# Altium PCB CurrentShuntAmp.PcbDoc
Units mil, origin at the board's own origin, x right, y up, seen from the top; angles counter-clockwise.
Board outline 922.5 x 260 mil, 2 copper layers (Component Side, Bottom Layer), stack 12.8 mil thick; 7 components, 6 nets, 23 pads, 0 vias.
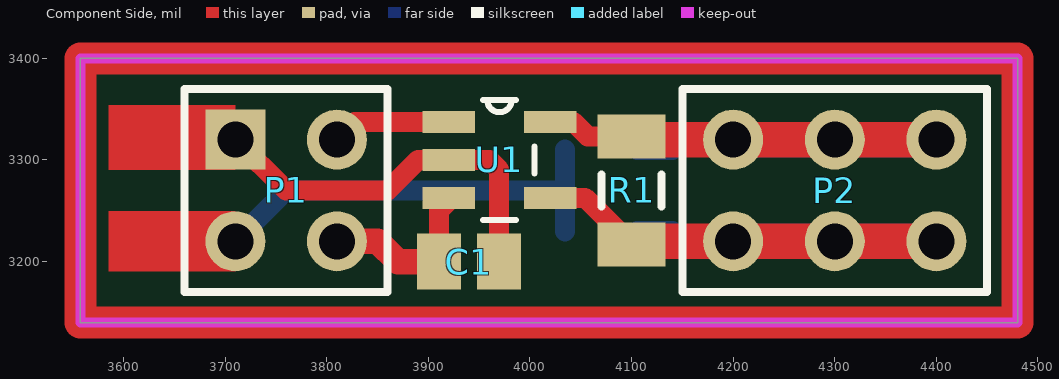
[diagram p0: Component Side view]
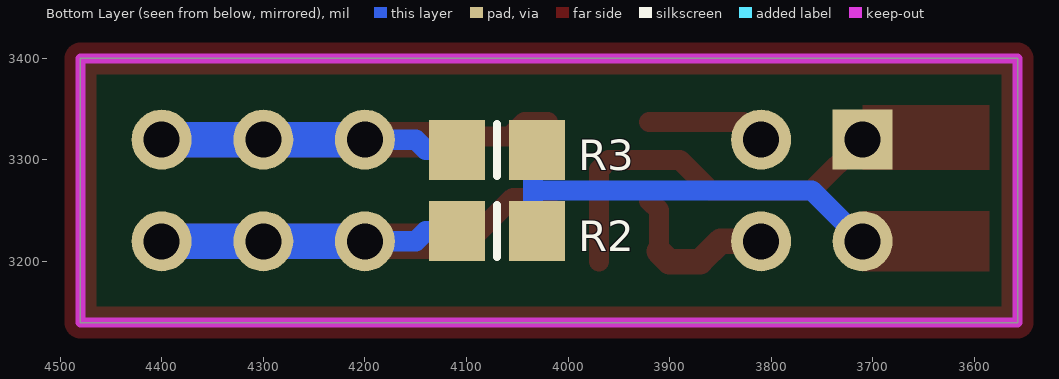
[diagram p1: Bottom Layer view, seen from below]
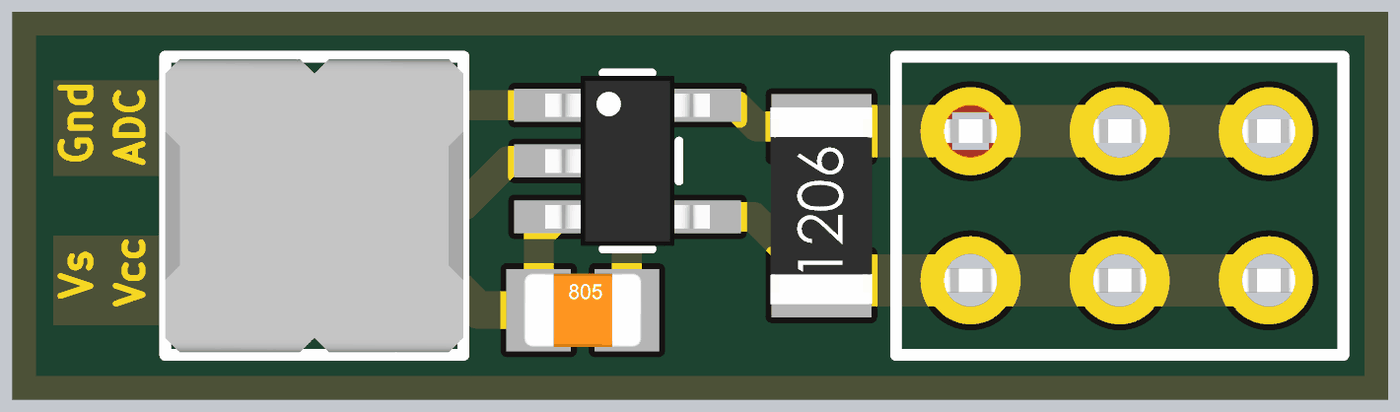
[diagram p2: 3D render of the assembled board from above, using the file's embedded part models]

## Layer stack, top to bottom
Top Solder: solder mask 0.4, Solder Resist, Dk 3.5
Component Side: signal copper 1.4
Dielectric 1: core 10, FR-4, Dk 4.2
Bottom Layer: signal copper 1.4
Solder Side: solder mask 0.4, Solder Resist, Dk 3.5

## Board outline
3557.5,3140 3557.5,3400 4480,3400 4480,3140

## Design rules (kind name [scope] priority, off if disabled: settings)
Clearance [All] p1: gap=10
PolygonConnect [All] p1: connectstyle=Direct reliefconductorwidth=10 reliefentries=4 polygonreliefangle="90 Angle" airgapwidth=10
RoutingVias [All] p1: holewidth=28 width=50 viastyle="Through Hole" minholewidth=28 minwidth=50 maxholewidth=28 maxwidth=50
SolderMaskExpansion [All] p1: expansion=4
Width [All] p1: maxlimit=40 minlimit=10 preferedwidth=10 minimp=50.000000 maximp=50.000000 favimp=50.000000
30 further rules are at their usual default settings.

## Components (designator, comment, footprint, x,y, rotation, side; value= is the part's Value field where it differs from the comment)
C1 "Cap" C0805 3940,3200 r0 top
P1 "Header 2X2" HDR2X2 3710,3320 r270 top
P2 "Header 3X2" HDR2X3 4200,3220 r0 top
R1 "Res1" C1206 4100,3270 r90 top
R2 "Res1" 6-0805_M 4070,3230 r180 bottom
R3 "Res1" 6-0805_M 4070,3310 r180 bottom
U1 "MAX4376FAUK+" 21-0057F 3970,3300 r0 top

## Footprints (in the part's own frame and the unit in brackets; to place one, negate y for a bottom-side part, rotate by r counter-clockwise, add the part's x,y. Pads: shape width x height; smd on the part's side, far side on the other; paste and mask are expansions set on the pad)
6-0805_M [mm] "Chip Resistor, Body 2.0x1.2mm, IPC Low Density"
  rect 1.4x1.5 smd: 1(-1,0) 2(1,0)
  silkscreen extent 0,-0.65 0,0.65, body extent -1.15,-0.67 1.15,0.68, height 0.76
21-0057F [mil]
  rect 52x22 smd: 1(-50,37.4) 2(-50,0) 3(-50,-37.4) 4(50,-37.4) 5(50,37.4)
  silkscreen extent -16,-59 34,59, body extent -55,-57 55,57, height 57
C0805 [mm] "Chip Capacitor, Body 2.0x1.3mm, IPC High Density"
  rect 1.1x1.4 smd: 1(-0.75,0) 2(0.75,0)
  body extent -1,-0.62 1,0.63, height 0.78
C1206 [mm] "Chip Capacitor, Body 3.2x1.6mm, IPC High Density"
  rect 1.1x1.7 smd: 1(-1.35,0) 2(1.35,0)
  silkscreen extent -0.4,-0.75 0.4,0.75, body extent -1.67,-0.86 1.68,0.87, height 0.85
HDR2X2 [mm] "Connector; Header; 2x2 Position"
  rect 1.5x1.5 hole 0.9: 1(0,0)
  round 1.5 hole 0.9: 2(0,2.54) 3(2.54,0) 4(2.54,2.54)
  silkscreen extent -1.27,-1.27 3.81,3.81, body extent -1.23,-1.27 3.77,3.81, height 8.6
HDR2X3 [mm] "Connector; Header; 3x2 Position"
  round 1.5 hole 0.9: 1(0,0) 2(0,2.54) 3(2.54,0) 4(2.54,2.54) 5(5.08,0) 6(5.08,2.54)
  silkscreen extent -1.27,-1.27 6.35,3.81, body extent -1.39,-1.23 6.48,3.77, height 2.79

## Part data
C1: library part "Cap Semi", "Capacitor (Semiconductor SIM Model)"
P1: "Header, 2-Pin, Dual row"
P2: "Header, 3-Pin, Dual row"
R1 R2 R3: "Resistor"
U1: "Imported"

## Nets (pads, with @x,y where several pads share a name; then routed paths per layer and width w, separated by ;. In a path a pad name is that pad's centre, name@x,y a point inside that pad or via, vN(x,y) a via of type N, cw(c..) or ccw(c..) an arc to the next point about the centre after c; other vN are vias at no path point)
ADC: P1.2 U1.1 | length 117.2
  Component Side w20: P1.2 3827.4,3337.4 U1.1
GND: C1.2 P1.1 U1.2 | length 387.1
  Component Side w20: P1.1 3760,3270 3860,3270 3890,3300 U1.2 3960,3300 3969.53,3290.47 C1.2
NetP2_1: P2.1 P2.3 P2.5 R1.1 R2.1 U1.4 | length 697.7
  Component Side w20: U1.4 4054.25,3262.6 R1.1
  Component Side w35: R1.1@4100,3220 P2.1 P2.3 P2.5
  Bottom Layer w20: R2.1@4105.43,3230 4140,3230 4150,3220 P2.1
  Bottom Layer w35: P2.1 P2.3 P2.5
NetP2_2: P2.2 P2.4 P2.6 R1.2 R3.1 U1.5 | length 684.6
  Component Side w20: U1.5 4042.6,3337.4 4056.85,3323.15 R1.2
  Component Side w35: R1.2@4100,3320 P2.2 P2.4 P2.6
  Bottom Layer w20: R3.1@4105.43,3310 4140,3310 4150,3320 P2.2
  Bottom Layer w35: P2.2 P2.4 P2.6
VCC: C1.1 P1.4 U1.3 | length 169.4
  Component Side w20: C1.1@3910.47,3210 3910.47,3250.47 3920,3260 U1.3
  Component Side w25: P1.4 3850,3220 3870,3200 3900.47,3200 C1.1@3910.47,3210
VSENSE: P1.3 R2.2 R3.2 | length 425.3
  Bottom Layer w20: P1.3 3760,3270 4034.57,3270 ; R2.2@4034.57,3230 4034.57,3270 ; R3.2@4034.57,3310 4034.57,3270
copper on no net: | length 2365
  Component Side w31.5: 3557.5,3140 3557.5,3400 4480,3400 4480,3140 3557.5,3140

## Keep-outs
Keep-Out Layer:
  the board outline again, w10

## Other copper
Component Side:
  region net GND: 3710,3290 3710,3354 3585,3354 3585,3290
  region net VSENSE: 3710,3190 3710,3250 3585,3250 3585,3190

## Silkscreen, mask and mechanical layers (free items; w line width, h text height)
Top Solder:
  text "Gnd" at 3610,3295 h20 r90
  text "ADC" at 3645,3295 h18 r90
  text "Vs" at 3610,3205 h20 r90
  text "Vcc" at 3645,3200 h18 r90